# EAGLE board dhruv (EAGLE 8.0.2)
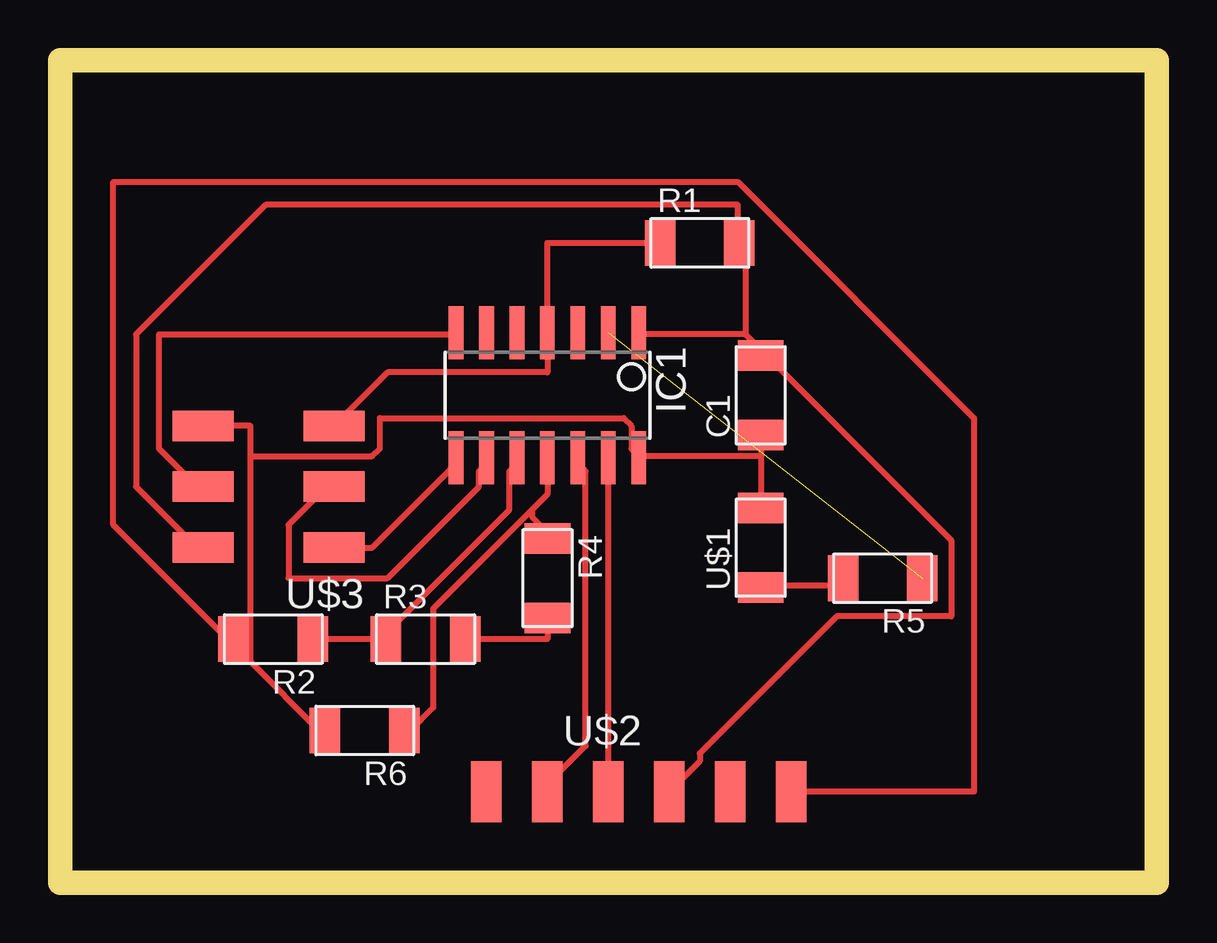
[diagram p0: board, top side]

Size 45.72 x 34.29 mm. Coordinates in mm from the lower left corner, seen from the top.
Outline: 45.7,0 45.7,33.96 0,33.96 0,0
Outline: 0,0 0,34.29 45.72,34.29 45.72,0 45.7,0
Outline: 0,0 45.7,0
Copper layers (1*16): Top 0.035mm / dielectric 1.5mm / Bottom 0.035mm
Design rules "default": minimum track width 10mil, minimum drill 24mil, track to track 8mil, track to pad 8mil, pad to pad 8mil, via to via 8mil, smd to smd 8mil, copper to edge 40mil, drill to drill 8mil, minimum pad ring 10mil, minimum via ring 8mil, stop-mask expansion 4mil, vias tented up to drill 0mil, thermal gap 10mil
Net classes: 0 default: width 0.1 mm, clearance 0.4 mm

## Footprints (pad centres in the part's own frame; a part is rotated, then mirrored left to right if it is on the bottom)
C1206FAB = smd 1.27 x 1.905: 1 -1.651,0; 2 1.651,0
SOIC14 = smd 0.61 x 2.21: 1 -3.81,-2.603; 2 -2.54,-2.603; 3 -1.27,-2.603; 4 0,-2.603; 5 1.27,-2.603; 6 2.54,-2.603; 7 3.81,-2.603; 8 3.81,2.603; 9 2.54,2.603; 10 1.27,2.603; 11 0,2.603; 12 -1.27,2.603; 13 -2.54,2.603; 14 -3.81,2.603
R1206FAB = smd 1.27 x 1.905: 1 -1.651,0; 2 1.651,0
LED1206FAB = smd 1.27 x 1.905: 1 -1.651,0; 2 1.651,0
1X06SMD = smd 2.54 x 1.27: 1 0,6.35; 2 0,3.81; 3 0,1.27; 4 0,-1.27; 5 0,-3.81; 6 0,-6.35
2X03SMD = smd 2.54 x 1.27: 1 -2.54,2.54; 2 2.92,2.54; 3 -2.54,0; 4 2.92,0; 5 -2.54,-2.54; 6 2.92,-2.54

## Placement (x,y rotation side)
C1  CAP-US1206FAB  [C1206FAB]  29.21,20.32 90 top
IC1  ATTINY44-SSU  [SOIC14]  20.32,20.32 180 top
R1  10k  [R1206FAB]  26.67,26.67 0 top
R2  10k  [R1206FAB]  8.89,10.16 180 top
R3  10k  [R1206FAB]  15.24,10.16 0 top
R4  10k  [R1206FAB]  20.32,12.7 270 top
R5  4pp  [R1206FAB]  34.29,12.7 180 top
R6  NTC  [R1206FAB]  12.7,6.35 180 top
U$1  LEDFAB1206  [LED1206FAB]  29.21,13.97 90 top
U$2  FTDI-SMD-HEADER  [1X06SMD]  24.13,3.81 270 top
U$3  AVRISPSMD  [2X03SMD]  8.89,16.51 180 top

## Library data of the parts
C1 IC1 R1-R6 U$1-U$3 = fab

## Nets
GND: C1.1 IC1.14 R2.2 R6.2 U$1.2 U$2.1 U$3.6
INTERLINK: R3.2 R4.2
MISO: IC1.8 U$3.1
MOSI: IC1.7 U$3.4
N$1: R5.2 U$1.1
PA2: IC1.11 R4.1 R6.1
PA3: IC1.10 R2.1 R3.1
RESET: IC1.4 R1.1 U$3.5
RX: IC1.12 U$2.5
SCK: IC1.9 U$3.3
SWITCH: IC1.2 R5.1
TX: IC1.13 U$2.4
VCC: C1.2 IC1.1 R1.2 U$2.3 U$3.2

## Tracks (layer width: path | path; a pad name or v marks a point on that pad's centre or on a via)
GND
  Top 0.254: C1.1 29.21,17.78 | 29.21,17.78 U$1.2 | 29.21,17.78 24.13,17.78 | 7.94,9.21 7.3,9.84 7.3,10.16 R2.2 6.99,10.16 2.22,14.92 2.22,29.21 28.26,29.21 38.1,19.37 38.1,3.81 U$2.1 | 7.94,9.21 10.79,6.35 R6.2 | U$3.6 7.94,19.05 7.94,17.78 | 7.94,9.21 7.94,17.78 | 24.13,17.78 23.81,18.1 23.81,19.05 23.5,19.37 13.34,19.37 13.34,18.1 13.02,17.78 7.94,17.78 | 24.13,17.78 IC1.14
INTERLINK
  Top 0.254: R3.2 20.32,10.16 R4.2
MISO
  Top 0.254: U$3.1 13.02,13.97 16.51,17.46 IC1.8
MOSI
  Top 0.254: IC1.7 16.51,22.86 4.13,22.86 4.13,18.1 5.71,16.51 U$3.4
N$1
  Top 0.254: U$1.1 29.21,12.38 32.38,12.38 32.38,12.7 R5.2
PA2
  Top 0.254: 19.68,15.56 20.32,16.19 IC1.11 | 19.68,15.56 15.56,11.43 15.56,7.3 14.61,6.35 R6.1 | 19.68,15.56 19.68,15.24 20.32,14.61 R4.1
PA3
  Top 0.254: R2.1 R3.1 13.65,10.16 13.65,10.48 18.73,15.56 18.73,17.14 19.05,17.46 IC1.10
RESET
  Top 0.254: R1.1 20.32,26.67 IC1.4 20.32,21.27 13.65,21.27 U$3.5
RX
  Top 0.254: U$2.5 20.32,4.13 21.91,5.71 21.91,17.14 21.59,17.46 IC1.12
SCK
  Top 0.254: U$3.3 11.11,16.51 9.53,14.92 9.53,12.7 13.65,12.7 17.46,16.51 17.46,17.14 17.78,17.46 IC1.9
SWITCH  (1 unrouted)
TX
  Top 0.254: U$2.4 IC1.13
VCC
  Top 0.254: 28.57,22.86 29.21,22.22 | 28.57,22.86 28.57,26.67 R1.2 28.26,26.67 28.26,28.26 8.57,28.26 3.17,22.86 3.17,16.51 5.71,13.97 U$3.2 | 28.57,22.86 24.13,22.86 IC1.1 | U$2.3 26.67,5.08 26.67,5.4 32.38,11.11 37.15,11.11 37.15,14.29 29.21,22.22 | 29.21,22.22 C1.2